# Altium PCB PCB2.PcbDoc
Units mm, origin at the board's own origin, x right, y up, seen from the top; angles counter-clockwise.
Board outline 39.37 x 28.7 mm, 2 copper layers (Top Layer, Bottom Layer); 12 components, 6 nets, 32 pads, 6 vias.
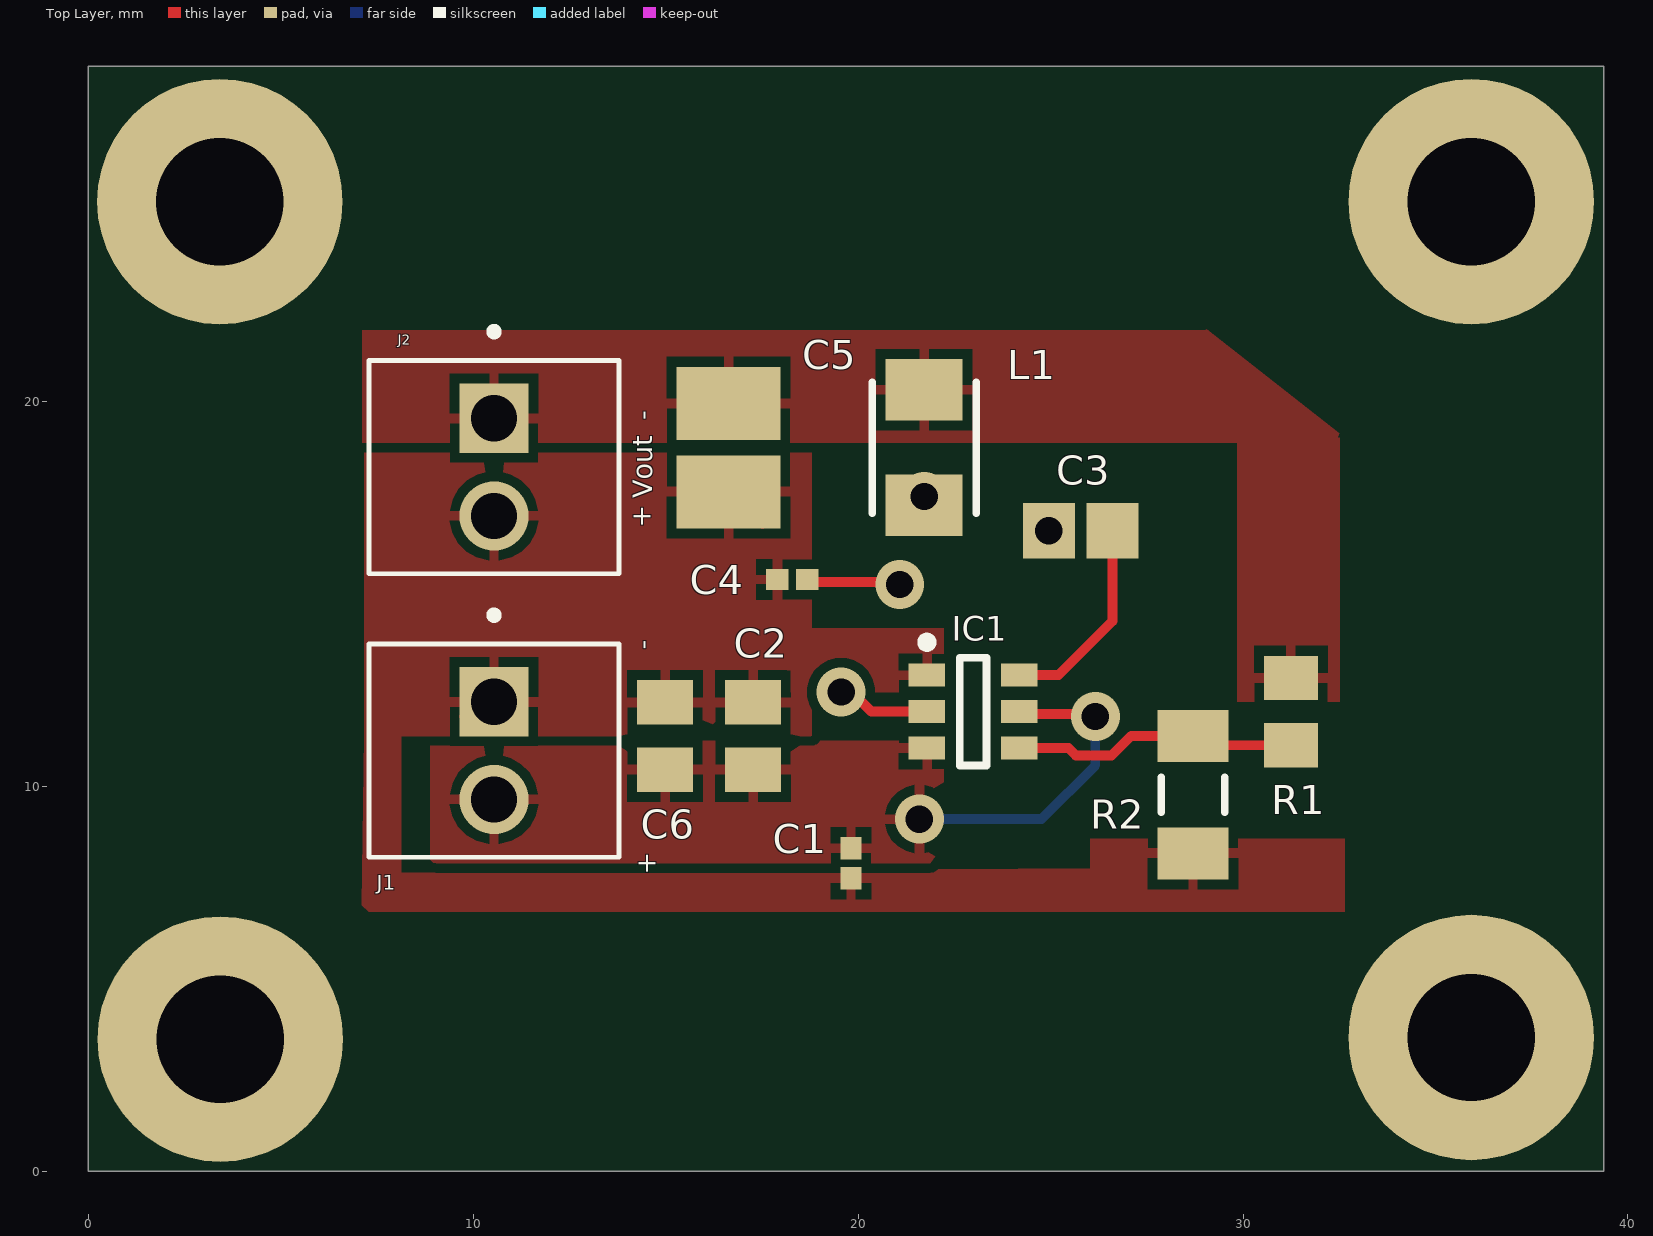
[diagram p0: Top Layer view]
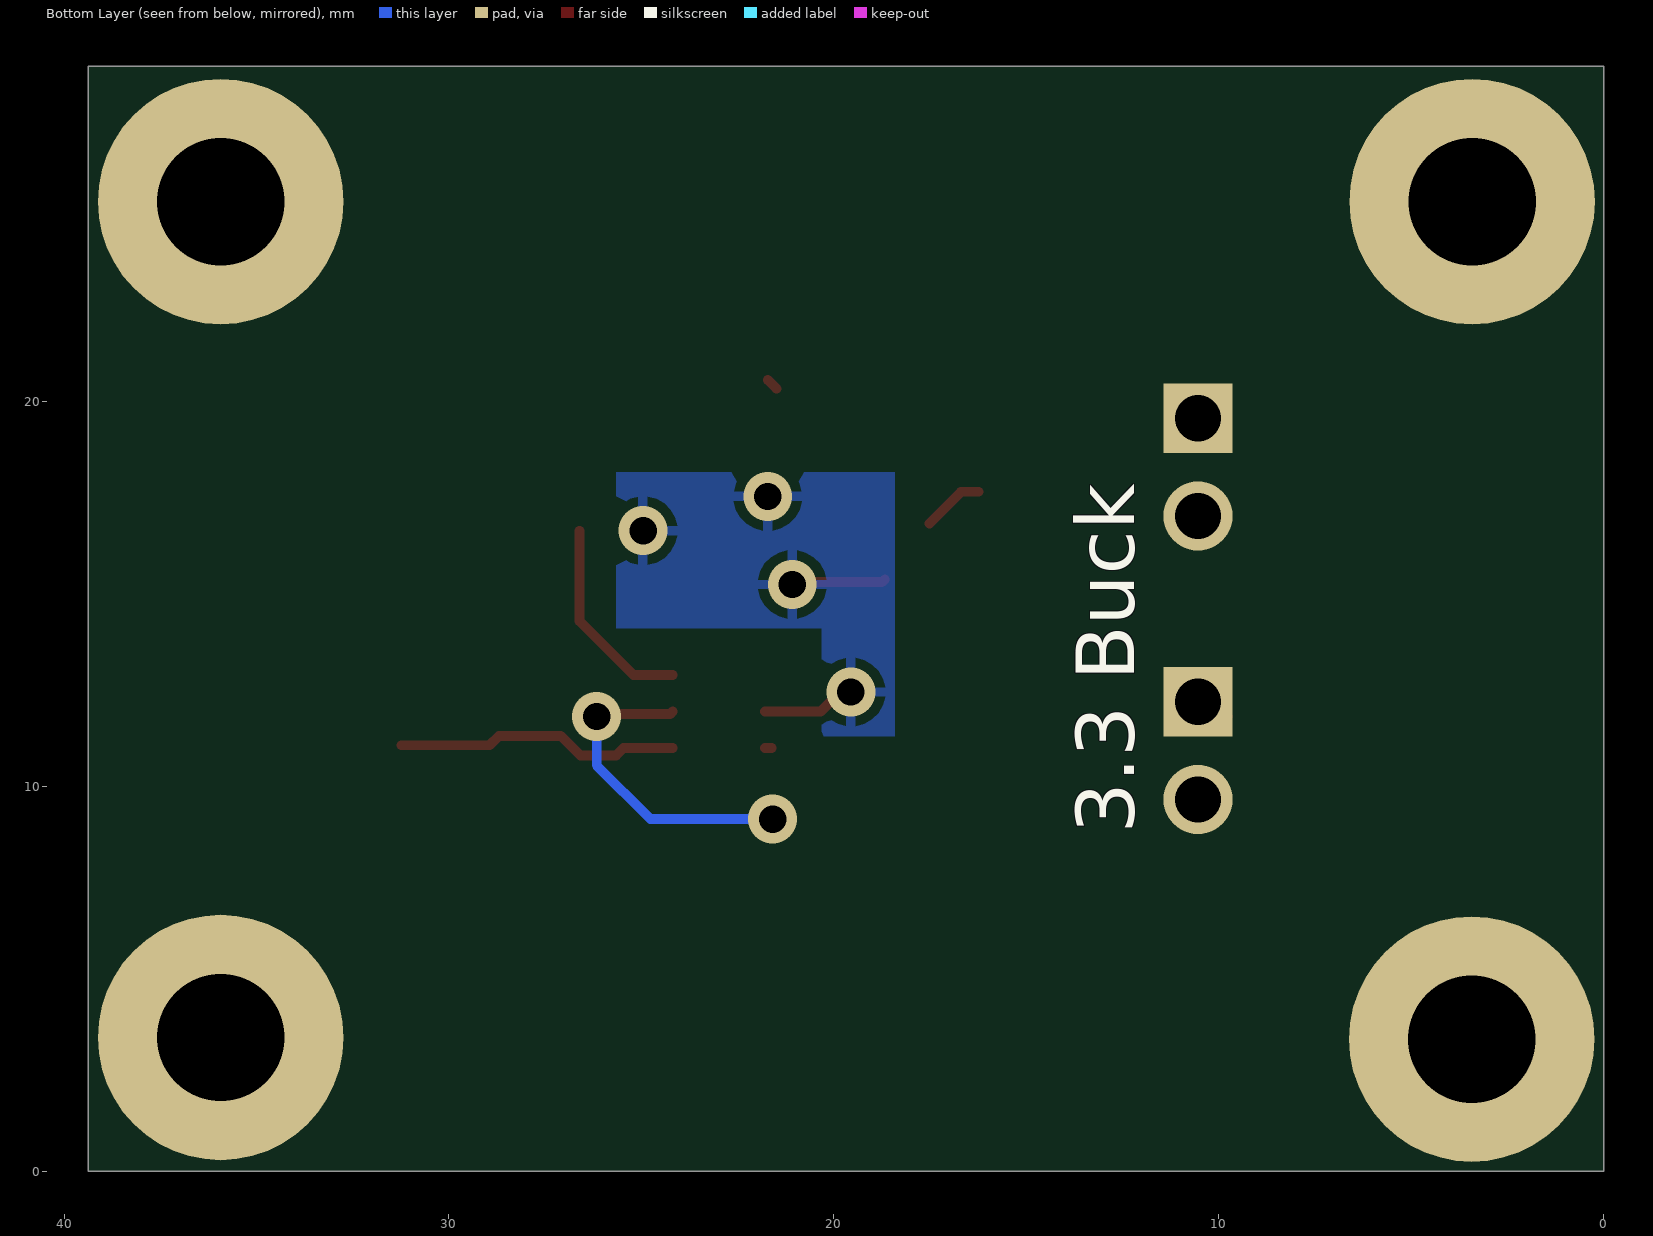
[diagram p1: Bottom Layer view, seen from below]

## Layer stack, top to bottom
Top Solder: solder mask 0.0102, Solder Resist, Dk 3.5
Top Layer: signal copper 0.0356
Dielectric 1: dielectric 0.32, FR-4, Dk 4.8
Bottom Layer: signal copper 0.0356
Bottom Solder: solder mask 0.0102, Solder Resist, Dk 3.5

## Board outline
39.37,28.702 39.37,0 0,0 0,28.702

## Design rules (kind name [scope] priority, off if disabled: settings)
AssemblyTestPointUsage [All] p1: isadvanced=TRUE
AssemblyTestpoint [All] p1: isadvanced=TRUE testpointundercomponent=TRUE minsize=1.016 maxsize=2.54 preferedsize=1.524 minholesize=0 maxholesize=1.016 preferedholesize=0.813 testpointgrid=0.025 usegrid=TRUE gridtolerance=0 allowsidetop=TRUE allowsidebottom=TRUE
Clearance Clearance_1 [OnMid vs OnMid] p1: gap=0.254 ignorepadtopadclearanceinfootprint=FALSE sourcerule=37 cellrowname=All cellrowtype=0 cellcolname=All cellcoltype=0 innerlayers=TRUE
Clearance Clearance_2 [(ExistsOnLayer('Top Layer') Or ExistsOnLayer('Bottom Layer')) vs (ExistsOnLayer('Top Layer') Or ExistsOnLayer('Bottom Layer'))] p2: gap=0.254 ignorepadtopadclearanceinfootprint=FALSE sourcerule=37 cellrowname=All cellrowtype=0 cellcolname=All cellcoltype=0 outerlayers=TRUE
Clearance [All] p3: gap=0.254 ignorepadtopadclearanceinfootprint=FALSE ismatrix=TRUE
ComponentClearance [All] p1: isadvanced=TRUE gap=0.254 collisioncheckmode=3 verticalgap=0.254 showdistances=FALSE
FabricationTestPointUsage [All] p1: isadvanced=TRUE valid=0 allowmultiple=FALSE
FabricationTestpoint [All] p1: isadvanced=TRUE side=3 testpointundercomponent=TRUE minsize=1.016 maxsize=2.54 preferedsize=1.524 minholesize=0 maxholesize=1.016 preferedholesize=0.813 testpointgrid=0.025 allowsidetop=TRUE allowsidebottom=TRUE usegrid=TRUE gridtolerance=0
FanoutControl Fanout_BGA [IsBGA] p1: isadvanced=TRUE bgadir=Out bgaviamode=Centered fanoutstyle=Auto fanoutdirection=Alternating viagrid=0.025 // Fanout_BGA (Default Rule)
FanoutControl Fanout_LCC [IsLCC] p2: isadvanced=TRUE bgadir=Out bgaviamode=Centered fanoutstyle=Auto fanoutdirection=Alternating viagrid=0.025 // Fanout_LCC (Default Rule)
FanoutControl Fanout_SOIC [IsSOIC] p3: isadvanced=TRUE bgadir=Out bgaviamode=Centered fanoutstyle=Auto fanoutdirection=Alternating viagrid=0.025 // Fanout_SOIC (Default Rule)
FanoutControl Fanout_Small [(CompPinCount < 5)] p4: isadvanced=TRUE bgadir=Out bgaviamode=Centered fanoutstyle=Auto fanoutdirection=OutThenIn viagrid=0.025 // Fanout_Small (Default Rule)
FanoutControl Fanout_Default [All] p5: isadvanced=TRUE bgadir=Out bgaviamode=Centered fanoutstyle=Auto fanoutdirection=Alternating viagrid=0.025 // Fanout_Default (Default Rule)
Height [All] p1: isadvanced=TRUE minheight=0 maxheight=25.4 prefheight=12.7
HoleSize [All] p1: isadvanced=TRUE absolutevalues=TRUE maxlimit=3.81 minlimit=0.025 maxpercent=80.000 minpercent=20.000
HoleToHoleClearance [All] p1: isadvanced=TRUE gap=0.254 allowstackedmicrovias=TRUE
LayerPairs [All] p1: isadvanced=TRUE enforce=TRUE
MinimumSolderMaskSliver [All] p1: isadvanced=TRUE minsoldermaskwidth=0.075
NetAntennae [All] p1: isadvanced=TRUE netantennaetolerance=0
PasteMaskExpansion [All] p1: isadvanced=TRUE expansion=0
PlaneClearance [All] p1: isadvanced=TRUE clearance=0.508
PlaneConnect [All] p1: isadvanced=TRUE planeconnectstyle=Relief reliefexpansion=0.508 reliefentries=4 reliefconductorwidth=0.254 reliefairgap=0.254
PolygonConnect [All] p1: connectstyle=Relief reliefconductorwidth=0.254 reliefentries=4 polygonreliefangle="90 Angle" airgapwidth=0.254
RoutingCorners [All] p1: isadvanced=TRUE cornerstyle=45-Degree minsetback=2.54 maxsetback=2.54
RoutingPriority [All] p1: isadvanced=TRUE routingpriority=0
RoutingVias [All] p1: holewidth=0.711 width=1.27 viastyle="Through Hole" minholewidth=0.711 minwidth=1.27 maxholewidth=0.711 maxwidth=1.27
ShortCircuit [All] p1: isadvanced=TRUE allowed=FALSE
SilkToSilkClearance [All] p1: isadvanced=TRUE silktosilkclearance=0.254
SilkToSolderMaskClearance [IsPad] p1: isadvanced=TRUE minsilkscreentomaskgap=0.229 clearancetoexposedcopper=TRUE
SolderMaskExpansion [All] p1: isadvanced=TRUE expansion=0.102 istentingtop=FALSE
SupplyNets "Schematic Supply Nets" [InNet('GND')] p1: isadvanced=TRUE voltage=0.000
UnRoutedNet [All] p1: isadvanced=TRUE
UnpouredPolygon [All] p1: isadvanced=TRUE
Width [All] p1: maxlimit=0.254 minlimit=0.254 preferedwidth=0.254
4 further rules are at their usual default settings.

## Components (designator, comment, footprint, x,y, rotation, side; value= is the part's Value field where it differs from the comment)
C1 "Capacitor 0.1 uF +/- 5% 16 V 0402" CAPC1005X56X25LL10T15 19.812,8.001 r270 top value=100nF
C2 "MSAST21GBB5106MTNA01" CAPC2012X14N 17.272,11.303 r90 top value=10µF
C3 "08053C104KAT2A" CAPC2012X06N 25.781,16.637 r180 top value=100nF
C4 "Capacitor 0.1 uF +/- 5% 16 V 0402" CAPC1005X56X25LL10T15 18.288,15.367 r180 top value=100nF
C5 "GRM32ER61C476KE15L" CAPC3225X27N 16.637,18.796 r270 top value=47µF
C6 "MSAST21GBB5106MTNA01" CAPC2012X14N 14.986,11.303 r90 top value=10µF
IC1 "TPS561208DDCR" SOT95P245X110-6N 22.987,11.938 r0 top
J1 "282834-2" TE_282834-2 10.541,10.922 r270 top
J2 "282834-2" TE_282834-2 10.541,18.288 r270 top
L1 "NLCV32T-3R3M-PFR" INDP3225X24N 21.717,18.796 r90 top value=3.3µH
R1 "ERJ-6ENF3322V" CAPC2012X07N 31.242,11.938 r270 top value=33.2k
R2 "Resistor 10k +/-1% 1206 250 mW" RESC3216X60X45ML15T20 28.702,9.78 r270 top value=10k

## Footprints (in the part's own frame and the unit in brackets; to place one, negate y for a bottom-side part, rotate by r counter-clockwise, add the part's x,y. Pads: shape width x height; smd on the part's side, far side on the other; paste and mask are expansions set on the pad)
CAPC1005X56X25LL10T15 [mm] "Chip Capacitor, 2-Leads, Body 1.10x0.60mm, IPC High Density"
  rect 0.58x0.54 smd: 1(-0.39,0) 2(0.39,0)
  body extent -0.55,-0.3 0.55,0.3, height 0.56
CAPC2012X06N [mm] "Chip Capacitor, 2-Leads, Body 2.01x1.25mm, IPC Medium Density"
  rect 1.35x1.45 smd: 1(-0.825,0) 2(0.825,0)
  body extent -1.1,-0.72 1.11,0.72, height 0.56
CAPC2012X07N [mm] "Chip Capacitor, 2-Leads, Body 2.00x1.25mm, IPC Medium Density"
  rect 1.15x1.4 smd: 1(-0.875,0) 2(0.875,0)
  body extent -1.1,-0.67 1.1,0.67, height 0.7
CAPC2012X14N [mm] "Chip Capacitor, 2-Leads, Body 2.00x1.25mm, IPC Medium Density"
  rect 1.15x1.45 smd: 1(-0.875,0) 2(0.875,0)
  body extent -1.1,-0.72 1.1,0.72, height 1.45
CAPC3225X27N [mm] "Chip Capacitor, 2-Leads, Body 3.20x2.50mm, IPC Medium Density"
  rect 1.9x2.7 smd: 1(-1.15,0) 2(1.15,0)
  body extent -1.75,-1.35 1.75,1.35, height 2.7
INDP3225X24N [mm] "Precision Wire Wound Inductor, 2-Leads, Body 3.20x2.50mm, IPC Medium Density"
  rect 1.6x2 smd: 1(-1.5,0) 2(1.5,0)
  silkscreen extent -1.7,-1.35 1.7,1.35, body extent -1.7,-1.35 1.7,1.35, height 2.4
RESC3216X60X45ML15T20 [mm] "Chip Resistor, 2-Leads, Body 3.3x1.75mm, IPC Low Density"
  rect 1.35x1.85 smd: 1(-1.525,0) 2(1.525,0)
  silkscreen extent -0.45,-0.82 0.45,0.82, body extent -1.65,-0.87 1.65,0.87, height 0.6
SOT95P245X110-6N [mm] "SOT23, 6-Leads, Body 2.90x2.45mm, Pitch 0.95mm, IPC Medium Density"
  rect 0.95x0.6 smd: 1(-1.2,0.95) 2(-1.2,0) 3(-1.2,-0.95) 4(1.2,-0.95) 5(1.2,0) 6(1.2,0.95)
  silkscreen extent -1.32,-1.4 0.35,1.92, body extent -0.72,-1.37 0.72,1.38, height 1.1
TE_282834-2 [mm]
  rect 1.8x1.8 / inner round 1.8 / far side rect 1.8x1.8 hole 1.2: 1(-1.27,0)
  round 1.8 hole 1.2: 2(1.27,0)
  silkscreen extent -3.62,-3.25 2.77,3.25, body extent -2.77,-3.25 2.77,3.25, height 10

## Part data
C1 C4: library part CMP-001-00001-6, "Chip Capacitor, 0.1 uF, +/- 5%, 16 V, 0402 (1005 Metric)", Capacitor Type=Ceramic, Case/Package=0402, Max Operating Temperature=125°C, Min Operating Temperature=-55°C, Tolerance=5%, Voltage Rating=16V, Mounting Technology=SM, Pins=2, RoHS Compliant=True
C2 C6: library part CMP-001-00084-1, "Ceramic Capacitor, Multilayer, Ceramic, 25V, 20% +Tol, 20% -Tol, X5R, 15% TC, 10uF, Surface Mount, 0805", Max Operating Temperature=85°C, Min Operating Temperature=-55°C, Height=1.25mm, Length=2mm, Mounting Technology="Surface Mount", Width=1.25mm
C3: library part CMP-001-00085-1, "0805 100 nF 25V ±10 % Tolerance X7R Surface Mount Multilayer Ceramic Capacitor", Case/Package=0805, Dielectric=X7R, Dielectric Material=Ceramic, Max Operating Temperature=125°C, Min Operating Temperature=-55°C, Tolerance=10%, Voltage Rating=25V, Depth=1.25mm, Height=940µm, Mounting Technology="Surface Mount", Number of Terminals=2, Pins=2, Thickness=939.8µm, Voltage Rating (DC)=25V, Width=1.25mm
C5: library part CMP-001-00086-1, "Capacitor: ceramic; MLCC; 47uF; 16V; X5R; ±10%; SMD; 1210; Series: GRM", Case/Package=1210, Max Operating Temperature=85°C, Min Operating Temperature=-55°C, Tolerance=10%, Voltage=16V, Depth=2.5mm, Height=2.5mm, Length=3.2mm, Mounting Technology="Surface Mount", Pins=2, Voltage Rating=16V, Width=2.5mm
IC1: library part CMP-019-00049-1, "4.5V to 17V Input, 1A Output, Synchronous Step-Down Converter 6-SOT-23-THIN -40 to 125", Case/Package=SOT-23-6, Manufacturer Lifecycle Status=ACTIVE, Max Junction Temperature (Tj)=125°C, Max Operating Temperature=85°C, Max Supply Voltage=17V, Min Operating Temperature=-40°C, Min Supply Voltage=4.5V, Nominal Supply Current=590µA, Output Current=1A, Output Voltage=1.05V, Switching Frequency=580kHz, Height=1.1mm, Length=2.9mm, Lifecycle Status=Production, Max Duty Cycle=75%, Pins=6, RoHS=Compliant, Schedule B="8542390000, 8542390000", Thickness=870µm, Topology=Buck, Width=1.6mm
J1 J2: library part CMP-002-00072-1, "Terminal Block Connector PCB 2.54 mm 30-16 AWG Green 10 A 150 V M1.6", Case/Package=None, Centerline_Pitch="2.54 mm[.1 in]", Check_prices=https://www.snapeda.com/parts/282834-2/TE+Connectivity+AMP+Connectors/view-part/?ref=eda, Component Type=Standard, Design Item ID=282834-2, EU_RoHS_Compliance="Compliant with Exemptions", MF="TE Connectivity", MP=282834-2, Number_of_Positions=2, Pins=2, SnapEDA_Link=https://www.snapeda.com/parts/282834-2/TE+Connectivity+AMP+Connectors/view-part/?ref=snap, Source=282834-2.SchLib
L1: library part CMP-006-00023-1, "Inductor Power Unshielded Wirewound 3.3uH 20% 7.96MHz 15Q-Factor Ferrite 1A 192mOhm DCR 1210 T/R", Case/Package=1210, Current Rating=1A, Max Operating Temperature=125°C, Min Operating Temperature=-40°C, Self Resonant Frequency=54MHz, Tolerance=20%, Depth=2.7mm, Height=2.2mm, Length=3.2mm, Max Current Rating=1A, Mounting Technology="Surface Mount", Pins=2, Width=2.5mm
R1: library part CMP-009-00179-1, "Res Thick Film 0805 33.2K Ohm 1% 0.125W(1/8W) ±100ppm/°C Molded SMD Punched Carrier T/R", Case/Package=0805, Max Operating Temperature=155°C, Min Operating Temperature=-55°C, Tolerance=1%, Voltage Rating=150V, Depth=1.25mm, Height=600µm, Length=2mm, Mounting Technology="Surface Mount", Weight=5.499807mg, Width=1.25mm
R2: library part CMP-009-00016-5, "Chip Resistor, 10 KOhm, +/- 1%, 0.25 W, -55 to 155 degC, 1206 (3216 Metric)", Case/Package=1206, Max Operating Temperature=155°C, Min Operating Temperature=-55°C, Power=250mW, Tolerance=1%, Voltage Rating=200V, Mounting Technology=SM, Pins=2, RoHS Compliant=True

## Free pads (board coordinates)
  round 6.38 hole 3.31 unplated: 4(3.419,25.187) 4(3.429,3.429) 4(35.931,3.47) 4(35.931,25.187)

## Via types
v1: diameter 1.27, hole 0.711, Top Layer to Bottom Layer, 6 vias

## Nets (pads, with @x,y where several pads share a name; then routed paths per layer and width w, separated by ;. In a path a pad name is that pad's centre, name@x,y a point inside that pad or via, vN(x,y) a via of type N, cw(c..) or ccw(c..) an arc to the next point about the centre after c; other vN are vias at no path point)
GND: C1.2 C2.2 C4.2 C5.2 C6.2 IC1.1 J1.1 J2.2 R2.2 | length 2.5
  Top Layer w0.254: J1.1@9.768,11.811 J1.1 ; C5.2@16.237,17.646 C5.2 16.694,17.646 C5.2@17.517,16.823
SW: C3.2 C4.1 IC1.2 L1.1 | length 4.9
  Top Layer w0.254: C4.1 18.741,15.303 21.018,15.303 v1(21.082,15.24) ; v1(19.558,12.446) 19.833,12.446 20.341,11.938 IC1.2
  other v1: 24.956,16.637 21.717,17.526
VBST: C3.1 IC1.6 | length 5.3
  Top Layer w0.254: IC1.6 25.207,12.888 26.606,14.287 C3.1
VFB: IC1.4 R1.2 R2.1 | length 7.4
  Top Layer w0.254: IC1.4 25.462,10.988 25.655,10.795 26.583,10.795 27.093,11.305 R2.1 28.944,11.063 R1.2
VIN: C1.1 C2.1 C6.1 IC1.3 IC1.5 J1.2 | length 8.7
  Top Layer w0.254: v1@21.531,9.085 v1(21.59,9.144) ; IC1.3@21.612,10.988 IC1.3 ; IC1.5 24.251,11.874 26.098,11.874 v1(26.162,11.811)
  Bottom Layer w0.254: v1(21.59,9.144) 24.765,9.144 26.162,10.541 v1(26.162,11.811)
VOUT: C5.1 J2.1 L1.2 R1.1 | length 0.3
  Top Layer w0.254: L1.2@21.494,20.327 L1.2@21.717,20.55

## Polygon pours and split planes (outlines as drawn)
GND on Top Layer "GND_L01_P025" (solid, pour order 25): 32.639,8.636 26.035,8.636 26.035,6.731 32.639,6.731
GND on Top Layer "GND_L01_P020" (solid, pour order 20): 18.161,14.097 18.161,12.446 22.225,12.446 22.225,14.097
GND on Top Layer "GND_L01_P024" (solid, pour order 24): 8.128,6.731 26.416,6.731 26.416,7.874 8.128,7.747
GND on Top Layer "GND_L01_P023" (solid, pour order 23): 7.175,11.303 7.108,6.731 8.128,6.731 8.128,11.303
VIN on Top Layer "VIN_L01_P015" (solid, pour order 15): 8.89,11.176 22.225,11.176 22.225,8.001 8.89,8.001
GND on Top Layer "GND_L01_P012" (solid, pour order 12): 18.796,18.796 7.175,18.796 7.175,11.303 18.796,11.303
VOUT on Top Layer "VOUT_L01_P010" (solid, pour order 10): 32.512,19.05 32.512,12.192 29.845,12.192 29.845,19.05
VOUT on Top Layer "VOUT_L01_P009" (solid, pour order 9): 28.829,22.044 28.829,18.923 32.801,18.923
VOUT on Top Layer "VOUT_L01_P008" (solid, pour order 8): 27.559,21.844 29.083,21.844 29.083,18.923 27.559,18.923
VOUT on Top Layer "VOUT_L01_P000" (solid, pour order 0): 27.559,18.923 7.112,18.923 7.112,21.844 27.559,21.844
SW on Bottom Layer "SW_L02_P013" (solid, pour order 13): 25.654,14.097 25.654,18.161 18.415,18.161 18.415,14.097
SW on Bottom Layer "SW_L02_P028" (solid, pour order 28): 18.415,14.097 18.415,11.303 20.447,11.303 20.32,11.43 20.32,14.097

## Silkscreen, mask and mechanical layers (free items; w line width, h text height)
Top Overlay:
  text "-" at 14.656,19.507 h0.51 r90
  text "Vout" at 14.656,17.475 h0.51 r90
  text "+" at 14.613,16.713 h0.51 r90
  text "-" at 14.656,13.538 h0.51 r90
  text "+" at 14.74,7.696 h0.51 r90
Bottom Overlay:
  text "3.3 Buck" at 12.192,8.763 h1.52 r270